# EAGLE board BMI088_Breakout (EAGLE 9.6.2)
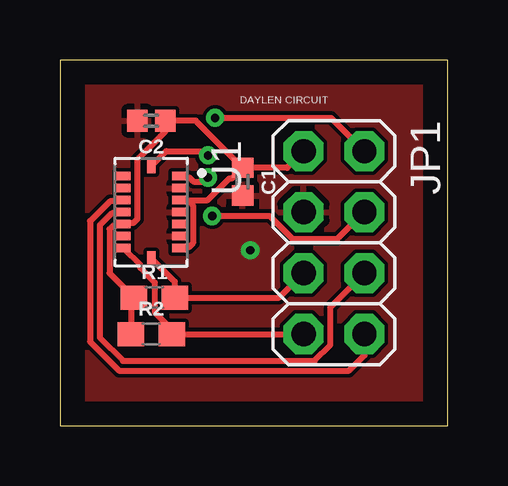
[diagram p0: board, top side]
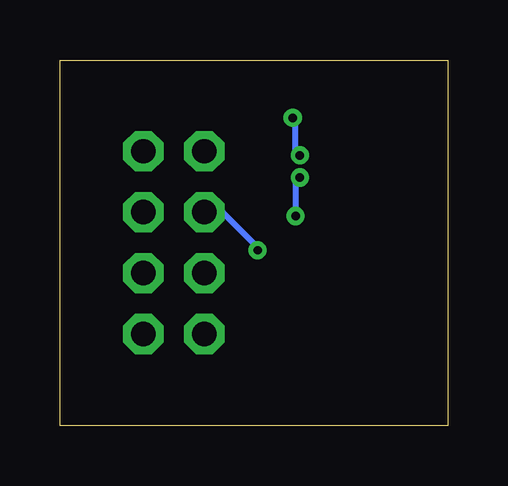
[diagram p1: board, bottom side, seen from below]

Size 16.18 x 15.23 mm. Coordinates in mm from the lower left corner, seen from the top.
Outline: 0,0 16.18,0 16.18,15.23 0,15.23 0,0
Copper layers (1*16): Top 0.035mm / dielectric 1.5mm / Bottom 0.035mm
Design rules "default": minimum track width 6mil, minimum drill 0.35mm, track to track 6mil, track to pad 6mil, pad to pad 6mil, via to via 6mil, smd to smd 6mil, copper to edge 40mil, drill to drill 6mil, minimum pad ring 10mil, minimum via ring 8mil, stop-mask expansion 4mil, vias tented up to drill 0mil, thermal gap 10mil

## Footprints (pad centres in the part's own frame; a part is rotated, then mirrored left to right if it is on the bottom)
0402 = smd 0.85 x 0.9: 1 -0.58,0; 2 0.58,0
2X04 = drill 1.016 pad 1.676 octagon: 1 -3.81,-1.27; 2 -3.81,1.27; 3 -1.27,-1.27; 4 -1.27,1.27; 5 1.27,-1.27; 6 1.27,1.27; 7 3.81,-1.27; 8 3.81,1.27
0603 = smd 1.1 x 1: 1 -0.85,0; 2 0.85,0
PQFN50P450X300X100-16N = smd 0.35 x 0.59: 1 -1.5,1.165; 2 -1,1.165; 3 -0.5,1.165; 4 0,1.165; 5 0.5,1.165; 6 1,1.165; 7 1.5,1.165; 9 1.5,-1.165; 10 1,-1.165; 11 0.5,-1.165; 12 0,-1.165; 13 -0.5,-1.165; 14 -1,-1.165; 15 -1.5,-1.165 | smd 0.59 x 0.35: 8 1.915,0; 16 -1.915,0

## Placement (x,y rotation side)
C1  0.1uF  [0402]  7.62,10.16 270 top
C2  0.1uF  [0402]  3.81,12.7 180 top
JP1  [2X04]  11.43,7.62 270 top
R1  0.1  [0603]  3.94,5.33 0 top
R2  0.1  [0603]  3.81,3.81 0 top
U1  BMI088  [PQFN50P450X300X100-16N]  3.81,8.89 270 top

## Library data of the parts
C1 C2 = SparkFun-Capacitors; PROD_ID: CAP-12416
JP1 = adafruit
R1 R2 = SparkFun-Resistors; PROD_ID: RES-15715
U1 = BMI088; AVAILABILITY: In Stock; DESCRIPTION: Accelerometer, Gyroscope, 6 Axis Sensor I²C, SPI Output; MF: Bosch Sensortec; MP: BMI088; PACKAGE: VFLGA-16 Bosch Sensortec; PRICE: None; PURCHASE-URL: https://pricing.snapeda.com/search/part/BMI088/?ref=eda

## Nets
GND: C1.2 C2.2 JP1.3 U1.2 U1.4 U1.6
HEADER2: JP1.2 U1.16
HEADER4: JP1.4 U1.1
HEADER5: JP1.5 R1.2 U1.8
HEADER6: JP1.6 U1.12
HEADER7: JP1.7 R2.2 U1.9
HEADER8: JP1.8 U1.13
VIN: C1.1 C2.1 JP1.1 R1.1 R2.1 U1.3 U1.7 U1.11

## Tracks (layer width: path | path; a pad name or v marks a point on that pad's centre or on a via)
GND  (via drill 0.35)
  Bottom 0.254: JP1.3 9.4,8.89 7.87,7.37 v7.94,7.3
  pour Top: -2.03,16.51 17.53,16.51 17.53,-1.27 -1.52,-1.27 -1.52,16 -2.03,16
HEADER2  (via drill 0.35)
  Top 0.254: U1.16 4.43,11.43 6.35,11.43 v6.17,11.26 | v6.47,12.82 11.31,12.82 JP1.2
  Bottom 0.254: v6.17,11.26 6.35,11.43 6.35,12.7 v6.47,12.82
HEADER4  (via drill 0.35)
  Top 0.254: U1.1 5.02,10.34 5.39,10.34 5.57,10.16 6.35,10.16 v6.17,10.34 | v6.35,8.73 8.74,8.73 9.7,7.77 11.58,7.77 JP1.4
  Bottom 0.254: v6.17,10.34 6.35,10.16 v6.35,8.73
HEADER5
  Top 0.254: U1.8 4.79,6 R1.2 9.14,5.33 JP1.5
HEADER6
  Top 0.254: U1.12 2.6,8.84 2.16,8.84 1.66,8.35 1.66,3.66 2.63,2.69 10.62,2.69 11.28,3.35 11.28,4.93 JP1.6
HEADER7
  Top 0.254: U1.9 3.36,6.68 3.36,6.56 3.96,5.96 3.96,4.72 4.66,4.02 R2.2 JP1.7
HEADER8
  Top 0.254: U1.13 2.6,9.34 2.08,9.34 1.26,8.52 1.26,3.49 2.46,2.29 12.06,2.29 12.7,2.92 JP1.8
VIN
  Top 0.254: R2.1 2.96,5.21 R1.1 2.07,6.35 2.07,8.18 2.23,8.34 2.6,8.34 U1.11 2.69,8.44 3.06,8.44 3.22,8.6 3.22,11.08 4.39,12.25 C2.1 5.66,12.7 C1.1 | JP1.1 9.47,10.74 C1.1 | C1.1 7.16,10.28 7.05,10.28 6.16,9.39 5.08,9.39 | U1.3 5.08,9.39 | U1.7 5.02,7.44 5.39,7.44 5.55,7.6 5.55,9.18 5.39,9.34 5.13,9.34 5.08,9.39

## Text on the board
tNames: DAYLEN CIRCUIT